# EAGLE board Transceiver_Board_V_1_5 (EAGLE 9.2.2)
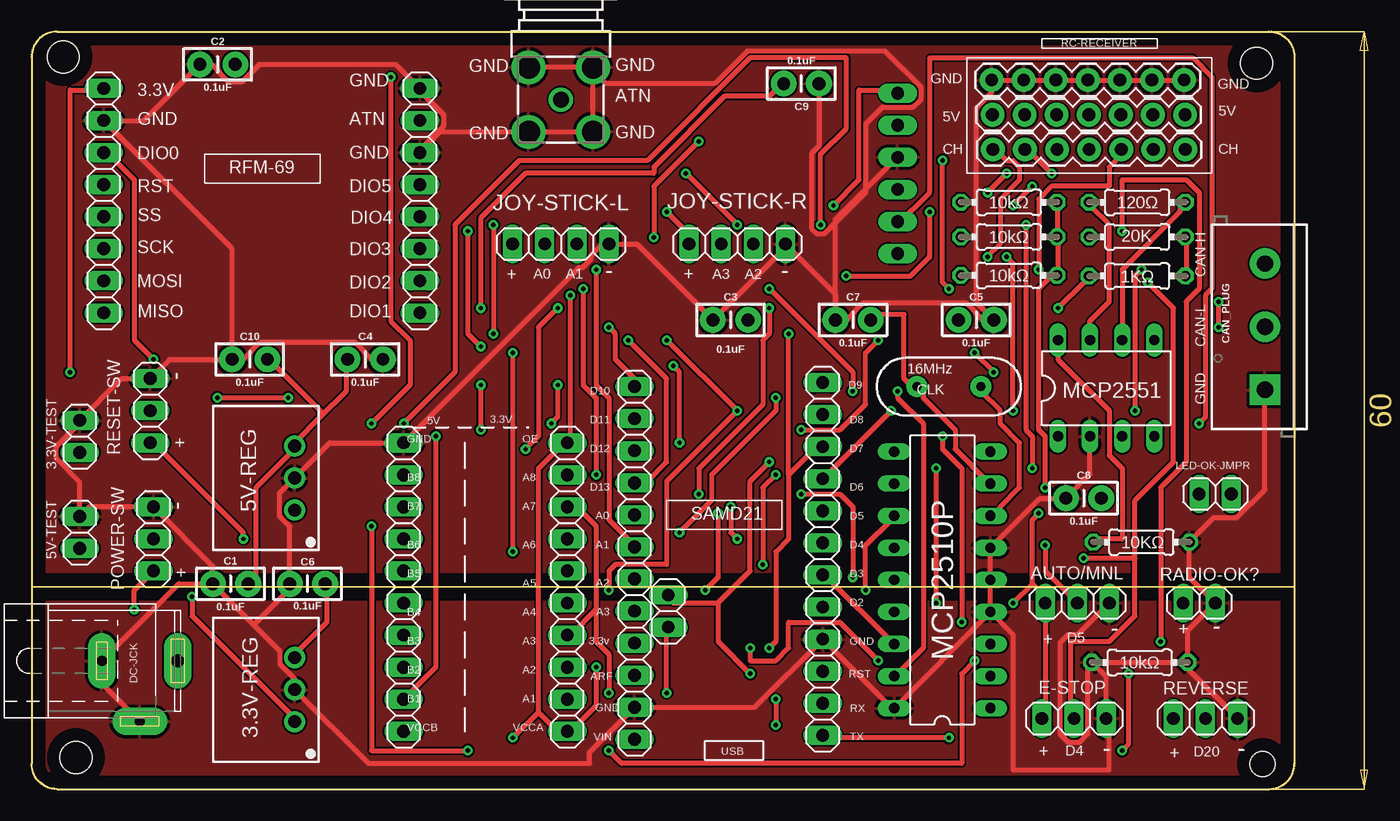
[diagram p0: board, top side]
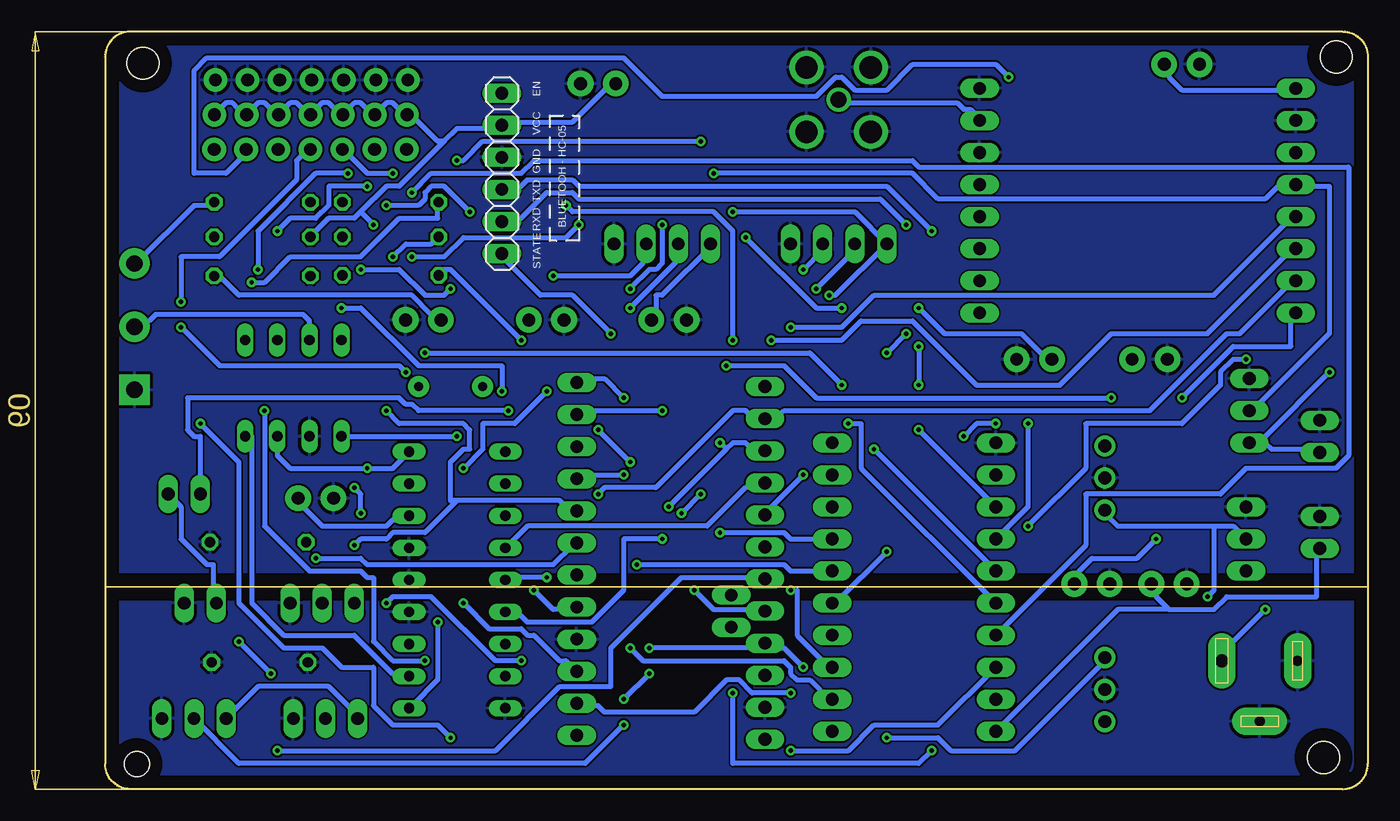
[diagram p1: board, bottom side, seen from below]

Size 100 x 60 mm. Coordinates in mm from the lower left corner, seen from the top.
Outline: 2,0 98,0 arc90 100,2 100,58 arc90 98,60 2,60 arc90 0,58 0,2 arc90 2,0
Copper layers (1*16): Top 0.035mm / dielectric 1.5mm / Bottom 0.035mm
Design rules "default *": minimum track width 15mil, minimum drill 0.35mm, track to track 6mil, track to pad 6mil, pad to pad 6mil, via to via 6mil, smd to smd 6mil, copper to edge 40mil, drill to drill 6mil, minimum pad ring 10mil, minimum via ring 8mil, stop-mask expansion 4mil, vias tented up to drill 0mil, thermal gap 10mil
Holes 2.54 mm at 2.51,58 97,57.49 3.52,2.51
Holes 2 mm at 97.49,2

## Footprints (pad centres in the part's own frame; a part is rotated, then mirrored left to right if it is on the bottom)
1X10 = drill 1.016 long: 1 -11.43,0; 2 -8.89,0; 3 -6.35,0; 4 -3.81,0; 5 -1.27,0; 6 1.27,0; 7 3.81,0; 8 6.35,0; 9 8.89,0; 10 11.43,0
SIP3 = drill 1 pad 1.676: 1 -2.54,0; 2 0,0; 3 2.54,0
1X02 = drill 1.016 long: 1 -1.27,0; 2 1.27,0
1X03 = drill 1.016 long: 1 -2.54,0; 2 0,0; 3 2.54,0
SPC4077 = drill 0.8 pad 2.184 long: 1 -3,0; 2 0,-4.8 | drill 1 pad 2.184 long: 3 3,0
1X06 = drill 1.016 long: 1 -6.35,0; 2 -3.81,0; 3 -1.27,0; 4 1.27,0; 5 3.81,0; 6 6.35,0
CAP-PTH-SMALL-KIT = drill 1.016 pad 2.032: 1 -1.397,0; 2 1.397,0
HC49US = drill 0.7 pad 1.651: 1 -2.54,0; 2 2.54,0
SCREWTERMINAL-5MM-3 = drill 1.3 pad 2.413 square: 1 0,0 | drill 1.3 pad 2.413: 2 5,0; 3 10,0
1X07 = drill 1.016 pad 1.88: 1 0,0; 2 2.54,0; 3 5.08,0; 4 7.62,0; 5 10.16,0; 6 12.7,0; 7 15.24,0
1X04 = drill 1.016 long: 1 -3.81,0; 2 -1.27,0; 3 1.27,0; 4 3.81,0
DIL18 = drill 0.813 long: 1 -10.16,-3.81; 2 -7.62,-3.81; 3 -5.08,-3.81; 4 -2.54,-3.81; 5 0,-3.81; 6 2.54,-3.81; 7 5.08,-3.81; 8 7.62,-3.81; 9 10.16,-3.81; 10 10.16,3.81; 11 7.62,3.81; 12 5.08,3.81; 13 2.54,3.81; 14 0,3.81; 15 -2.54,3.81; 16 -5.08,3.81; 17 -7.62,3.81; 18 -10.16,3.81
DIL08 = drill 0.813 long: 1 -3.81,-3.81; 2 -1.27,-3.81; 3 1.27,-3.81; 4 3.81,-3.81; 5 3.81,3.81; 6 1.27,3.81; 7 -1.27,3.81; 8 -3.81,3.81
0204/7 = drill 0.813 octagon: 1 -3.81,0; 2 3.81,0
1X08 = drill 1.016 long: 1 -8.89,0; 2 -6.35,0; 3 -3.81,0; 4 -1.27,0; 5 1.27,0; 6 3.81,0; 7 6.35,0; 8 8.89,0
BU-SMA-G = drill 1.27: 1 0,0 | drill 1.778: 2 -2.55,2.55; 3 2.55,2.55; 4 2.55,-2.55; 5 -2.55,-2.55
1X12 = drill 1.016 long: 1 -13.97,0; 2 -11.43,0; 3 -8.89,0; 4 -6.35,0; 5 -3.81,0; 6 -1.27,0; 7 1.27,0; 8 3.81,0; 9 6.35,0; 10 8.89,0; 11 11.43,0; 12 13.97,0

## Placement (x,y rotation side)
3.3-LOGIC  3.3V-LOGIC  [1X10]  42.42,16 90 top
3.3V-REG  3.3V REG  [SIP3]  20.83,7.87 90 top
3.3V-TEST  3.3V  [1X02]  3.81,27.94 90 top
5V-LOGIC  5V-LOGIC  [1X10]  29.46,16 90 top
5V-REG  5V REG  [SIP3]  20.83,24.64 90 top
5V-TEST  5V  [1X02]  3.81,20.32 90 top
AT/M  AUTO/MNL  [1X03]  82.8,14.73 0 top
BATTERY_INPUT_JACK  BATT-JACK  [SPC4077]  8.57,10.16 0 top
BLUETOOTH  BLUETOOTH  [1X06]  68.58,48.77 90 bottom
C1  0.1uF  [CAP-PTH-SMALL-KIT]  15.75,16.26 0 top
C2  0.1uF  [CAP-PTH-SMALL-KIT]  14.73,57.4 0 top
C3  0.1uF  [CAP-PTH-SMALL-KIT]  55.35,37.16 0 top
C4  0.1uF  [CAP-PTH-SMALL-KIT]  26.42,34.04 0 top
C5  0.1uF  [CAP-PTH-SMALL-KIT]  74.8,37.16 0 top
C6  0.1uF  [CAP-PTH-SMALL-KIT]  21.84,16.26 180 top
C7  0.1uF  [CAP-PTH-SMALL-KIT]  65.05,37.16 0 top
C8  0.1uF  [CAP-PTH-SMALL-KIT]  83.31,23.04 0 top
C9  0.1uF  [CAP-PTH-SMALL-KIT]  60.96,55.88 180 top
C10  0.1uF  [CAP-PTH-SMALL-KIT]  17.27,34.04 0 top
CAN_CLK  16MHz  [HC49US]  72.64,31.88 0 top
CAN_PLUG  CAN-PLUG  [SCREWTERMINAL-5MM-3]  97.66,31.62 90 top
COMM  COMM  [1X07]  76.13,50.66 0 top
E-STOP  E-STOP  [1X03]  82.55,5.59 0 top
I2C  I2C  [1X02]  50.42,14.1 90 top
JOY-STICK-L  LEFT-JOYSTICK  [1X04]  41.91,43.18 0 top
JOY-STICK-R  RIGHT-JOYSTICK  [1X04]  55.88,43.18 0 top
MCP2510P  MCP2510P  [DIL18]  72.12,16.57 90 top
MCP2551  MCP2551MCP2551  [DIL08]  85.09,31.75 0 top
POWER-SW  POWER-SW  [1X03]  9.65,19.81 90 top
R1  10kΩ  [0204/7]  77.39,46.48 0 top
R2  10kΩ  [0204/7]  77.39,43.74 0 top
R3  10kΩ  [0204/7]  77.39,40.69 0 top
R5  1KΩ  [0204/7]  87.55,40.64 0 top
R6  20K  [0204/7]  87.55,43.74 0 top
R7  10KΩ  [0204/7]  87.88,19.56 0 top
R8  120Ω  [0204/7]  87.55,46.48 0 top
R9  10kΩ  [0204/7]  87.76,10.03 0 top
RADIO-OK1  RADIO-OK-Jumper  [1X02]  93.73,23.37 0 top
RADIO-OK?  RADIO-OK?  [1X02]  92.46,14.73 0 top
RC-5V  RC-5V  [1X07]  76.1,53.41 0 top
RC-GND  RC-GND  [1X07]  76.02,56.17 0 top
RESET-SW  RESET-SW  [1X03]  9.4,29.97 90 top
REVERSE  REVERSE  [1X03]  92.96,5.59 0 top
RFM-69  RFM-69-R  [1X08]  30.75,46.61 90 top
RFM-ANTENNA  BU-SMA-G  [BU-SMA-G]  41.91,54.61 90 top
RFM_L  RFM-69-L  [1X08]  5.71,46.61 90 top
SAMD-21_R  SAMD-21-R  [1X12]  47.75,17.91 90 top
SAMD_21_L  SAMD-21-L  [1X12]  62.65,18.23 90 top

## Library data of the parts
3.3-LOGIC 3.3V-TEST 5V-LOGIC 5V-TEST AT/M BLUETOOTH E-STOP I2C JOY-STICK-L JOY-STICK-R POWER-SW RADIO-OK1 RADIO-OK? RESET-SW REVERSE RFM-69 RFM_L SAMD-21_R SAMD_21_L = pinhead
3.3V-REG 5V-REG = dc-dc-converter
BATTERY_INPUT_JACK = con-jack; OC_FARNELL: unknown; OC_NEWARK: unknown
C1-C10 = SparkFun-Capacitors; PROD_ID: CAP-08370
CAN_CLK = SparkFun-Clocks; PROD_ID: XTAL-08181; SF_ID: COM-00536
CAN_PLUG = SparkFun-Connectors; PROD_ID: CONN-10134; SF_SKU: PRT-08433
COMM RC-5V RC-GND = SparkFun-Connectors
MCP2510P = microchip_can
MCP2551 = MCP2551
R1-R3 R5-R9 = rcl; SPICEPREFIX: R
RFM-ANTENNA = con-coax; OC_FARNELL: unknown; OC_NEWARK: unknown

## Nets
3.3V-IN: 3.3-LOGIC.1 3.3-LOGIC.10 3.3V-REG.3 3.3V-TEST.1 AT/M.1 C2.2 C3.2 C6.1 E-STOP.1 JOY-STICK-L.1 JOY-STICK-R.1 R1.2 R2.2 R3.2 RESET-SW.1 REVERSE.1 RFM_L.8 SAMD-21_R.4
3.3V-IN1: C5.1 R5.2 R6.2
5V-IN: 5V-LOGIC.1 5V-REG.3 5V-TEST.1 BLUETOOTH.5 C1.2 C4.1 C9.2 C10.2 MCP2510P.9 MCP2551.3 R6.1 RC-5V.1 RC-5V.2 RC-5V.3 RC-5V.4 RC-5V.5 RC-5V.6 RC-5V.7
A0: JOY-STICK-L.2 SAMD-21_R.8
A1: JOY-STICK-L.3 SAMD-21_R.7
A2: JOY-STICK-R.3 SAMD-21_R.6
A3: JOY-STICK-R.2 SAMD-21_R.5
ATN: RFM-69.7 RFM-ANTENNA.1
BATT_V_IN: BATTERY_INPUT_JACK.3 POWER-SW.1
BT-RX: 5V-LOGIC.8 BLUETOOTH.3
CAN_RST: MCP2510P.17 R5.1
CANH: CAN_PLUG.2 MCP2551.7 R8.1
CANL: CAN_PLUG.3 MCP2551.6 R8.2
CH-1: 5V-LOGIC.2 COMM.1
CH-2: 5V-LOGIC.3 COMM.2
CH-3: 5V-LOGIC.4 COMM.3
CH-4: 5V-LOGIC.5 COMM.4
CH-5: 5V-LOGIC.6 COMM.5
CH-6: 5V-LOGIC.7 COMM.6
D2: MCP2510P.12 SAMD_21_L.5
D3: MCP2510P.16 SAMD_21_L.6
D4: E-STOP.2 R1.1 SAMD_21_L.7
D5: AT/M.2 R2.1 SAMD_21_L.8
D6: 3.3-LOGIC.6 RADIO-OK1.1 SAMD_21_L.9
D7: 3.3-LOGIC.2 BLUETOOTH.1 SAMD_21_L.10
D8: 3.3-LOGIC.3 BLUETOOTH.6 SAMD_21_L.11
D9: 3.3-LOGIC.7 SAMD_21_L.12
D10: RFM_L.4 SAMD-21_R.12
D11: MCP2510P.14 RFM_L.2 SAMD-21_R.11
D12: MCP2510P.15 RFM_L.1 SAMD-21_R.10
D13: MCP2510P.13 RFM_L.3 SAMD-21_R.9
D20: I2C.2 R3.1 REVERSE.2
D21: I2C.1 RFM_L.6
GND: 3.3V-REG.2 3.3V-TEST.2 5V-LOGIC.10 5V-REG.2 5V-TEST.2 AT/M.3 BATTERY_INPUT_JACK.1 BATTERY_INPUT_JACK.2 BLUETOOTH.4 C1.1 C2.1 C3.1 C4.2 C5.2 C6.2 C7.1 C8.1 C9.1 C10.1 CAN_PLUG.1 E-STOP.3 JOY-STICK-L.4 JOY-STICK-R.4 MCP2510P.4 MCP2510P.5 MCP2510P.6 MCP2510P.18 MCP2551.2 POWER-SW.3 R7.2 R9.1 R9.2 RADIO-OK?.2 RC-GND.1 RC-GND.2 RC-GND.3 RC-GND.4 RC-GND.5 RC-GND.6 RC-GND.7 RESET-SW.3 REVERSE.3 RFM-69.6 RFM-69.8 RFM-ANTENNA.2 RFM-ANTENNA.3 RFM-ANTENNA.4 RFM-ANTENNA.5 RFM_L.7 SAMD-21_R.2 SAMD_21_L.4
GRND: MCP2551.8 R7.1
INPUT_TO_REGULATOR_3.3V: 3.3V-REG.1 5V-REG.1 POWER-SW.2
N$1: RADIO-OK1.2 RADIO-OK?.1
OSC1: C7.2 CAN_CLK.1 MCP2510P.8
OSC2: C8.2 CAN_CLK.2 MCP2510P.7
RST: RESET-SW.2 RFM_L.5 SAMD_21_L.3
RX: 3.3-LOGIC.4 3.3-LOGIC.8 SAMD_21_L.2
RX-CAN: MCP2510P.2 MCP2551.4
TX: 3.3-LOGIC.5 BLUETOOTH.2 SAMD_21_L.1
TX-CAN: MCP2510P.1 MCP2551.1

## Tracks (layer width: path | path; a pad name or v marks a point on that pad's centre or on a via)
3.3V-IN  (via drill 0.35)
  Top 0.381: 3.3V-REG.3 20.83,10.67 23.37,13.21 23.37,16.26 C6.1 | v16.76,19.81 16.76,20.32 9.65,27.43 RESET-SW.1 | v3.05,33.02 3.05,55.37 5.59,55.37 RFM_L.8 | R1.2 81.28,46.23 81.28,44.2 R2.2 81.28,43.69 81.28,41.15 R3.2 80.77,40.64 79.76,39.62 79.76,28.45 80.26,27.94 v80.26,23.88 | E-STOP.1 80.26,5.59 AT/M.1 80.26,15.24 79.25,16.26 | v79.76,21.84 79.25,21.34 79.25,16.26 | v50.29,45.72 51.82,44.2 51.82,43.18 JOY-STICK-R.1 | v44.7,9.65 44.7,6.6 42.67,4.57 3.3-LOGIC.1 41.66,4.57 40.13,6.1 | 40.13,6.1 40.13,25.4 42.16,27.43 3.3-LOGIC.10 42.67,27.43 v42.67,39.12 | v77.72,14.73 79.25,16.26 | v67.06,10.16 64.01,13.21 59.94,13.21 59.94,11.18 58.93,10.16 56.9,10.16 v56.9,11.18 | 40.13,6.1 v38.1,4.06
  Bottom 0.381: RFM_L.8 6.1,55.37 14.73,55.37 15.75,56.39 15.75,57.4 C2.2 | 9.14,27.43 8.13,27.43 7.62,26.92 4.06,26.92 3.3V-TEST.1 | v16.76,19.81 18.29,18.29 21.84,18.29 22.86,17.27 22.86,16.26 C6.1 | v3.05,33.02 8.13,27.94 8.64,27.94 9.14,27.43 | 9.14,27.43 RESET-SW.1 | REVERSE.1 87.88,8.13 82.3,8.13 79.76,5.59 E-STOP.1 | v80.26,23.88 79.76,23.37 v79.76,21.84 | v50.29,45.72 40.64,45.72 JOY-STICK-L.1 42.16,39.12 v42.67,39.12 | C3.2 56.39,37.59 56.39,39.12 55.88,39.12 51.82,43.18 JOY-STICK-R.1 | v44.7,9.65 46.23,11.18 47.75,11.18 | v77.72,14.73 77.22,15.24 74.17,15.24 69.09,10.16 v67.06,10.16 | 47.75,11.18 v56.9,11.18 | 47.75,11.18 SAMD-21_R.4 | v38.1,4.06 34.04,4.06 33.02,3.05 27.94,3.05 20.83,10.16 3.3V-REG.3
3.3V-IN1
  Top 0.381: R5.2 91.44,40.64 91.44,43.69 R6.2
  Bottom 0.381: R5.2 90.93,40.64 89.41,39.12 75.69,39.12 74.17,37.59 73.66,37.59 C5.1
5V-IN  (via drill 0.35)
  Top 0.381: 22.86,29.46 24.89,31.5 24.89,34.04 C4.1 | 22.86,29.46 20.83,27.43 5V-REG.3 20.83,26.92 17.78,23.88 17.78,16.76 17.27,16.26 C1.2 | 22.86,29.46 22.86,29.97 18.8,34.04 C10.2 | v79.25,25.4 79.25,27.94 78.74,28.45 v78.74,44.7 | v35.56,38.1 35.56,45.21 39.12,48.77 49.28,48.77 49.28,49.28 54.86,54.86 58.42,54.86 59.44,55.88 C9.2
  Bottom 0.381: 15.75,14.22 12.19,14.22 11.18,15.24 4.06,15.24 4.06,18.8 5V-TEST.1 | 15.75,14.22 16.76,15.24 16.76,16.26 C1.2 | 5V-LOGIC.1 19.81,14.22 15.75,14.22 | MCP2551.3 86.36,26.42 85.34,25.4 v79.25,25.4 77.22,25.4 76.2,26.42 MCP2510P.9 | 79.76,45.72 77.72,47.75 76.71,47.75 73.15,51.31 | 79.76,45.72 80.26,45.21 82.3,45.21 83.31,44.2 R6.1 | 73.15,51.31 72.14,52.32 68.58,52.32 BLUETOOTH.5 68.58,52.83 62.99,52.83 59.94,55.88 C9.2 | 73.15,51.31 73.66,51.31 75.69,53.34 RC-5V.1 76.2,53.85 76.71,53.85 77.22,54.36 77.72,54.36 78.23,53.85 RC-5V.2 78.74,53.85 79.25,53.85 79.76,54.36 80.26,54.36 80.77,53.85 RC-5V.3 81.28,53.85 81.79,53.85 82.3,54.36 82.8,54.36 83.31,53.85 RC-5V.4 83.82,53.85 84.33,53.85 84.84,54.36 85.34,54.36 85.85,53.85 RC-5V.5 86.36,53.85 86.87,53.85 87.38,54.36 87.88,54.36 88.39,53.85 RC-5V.6 88.9,53.85 89.41,53.85 89.92,54.36 90.42,54.36 90.93,53.85 RC-5V.7 | 79.76,45.72 v78.74,44.7 | v35.56,38.1 33.53,36.07 27.43,36.07 25.4,34.04 C4.1
A0  (via drill 0.35)
  Top 0.381: v44.7,24.89 44.7,30.99 43.69,32 v43.69,39.62
  Bottom 0.381: v44.7,24.89 47.75,21.84 SAMD-21_R.8 | v43.69,39.62 40.64,42.67 JOY-STICK-L.2
A1  (via drill 0.35)
  Top 0.381: v44.7,41.15 44.7,32 45.72,30.99 45.72,21.34 47.75,19.3 SAMD-21_R.7
  Bottom 0.381: v44.7,41.15 43.18,42.67 JOY-STICK-L.3
A2  (via drill 0.35)
  Top 0.381: v86.36,3.05 86.87,3.56 v86.87,9.14 | v89.41,11.68 89.41,23.88 91.44,25.91 91.44,38.61 92.46,39.62 92.46,47.24 91.44,48.26 86.36,48.26 v86.36,44.2 | v77.72,46.23 v79.25,47.75 | v71.12,45.72 71.12,42.16 69.6,40.64 v64.52,40.64
  Bottom 0.381: v86.36,3.05 69.09,3.05 64.01,8.13 59.94,8.13 59.94,11.18 54.36,16.76 47.75,16.76 SAMD-21_R.6 | v89.41,11.68 v86.87,9.14 | v86.36,44.2 85.34,45.21 83.31,45.21 82.3,46.23 82.3,47.75 v79.25,47.75 | v77.72,46.23 75.18,46.23 74.68,46.74 74.68,47.24 74.17,47.75 73.15,47.75 v71.12,45.72 | v64.52,40.64 58.42,40.64 57.4,41.66 57.4,43.18 JOY-STICK-R.3
A3  (via drill 0.35)
  Top 0.381: v53.34,15.75 54.36,16.76 v54.36,21.84 | v52.83,23.37 52.83,25.4 57.91,30.48 57.91,35.56 58.42,36.07 v58.42,38.1
  Bottom 0.381: v53.34,15.75 51.82,14.22 47.75,14.22 SAMD-21_R.5 | v52.83,23.37 v54.36,21.84 | v58.42,38.1 54.86,41.66 54.86,43.18 JOY-STICK-R.2
ATN
  Bottom 0.381: RFM-69.7 30.99,53.34 31.5,53.85 32,53.85 32.51,54.36 41.66,54.36 RFM-ANTENNA.1
BATT_V_IN  (via drill 0.35)
  Top 0.381: POWER-SW.1 8.13,15.75 v8.13,14.22
  Bottom 0.381: v8.13,14.22 11.18,11.18 11.18,10.16 BATTERY_INPUT_JACK.3
BT-RX  (via drill 0.35)
  Top 0.381: v35.56,32 v35.56,28.45 | v35.56,35.05 34.54,36.07 v34.54,44.2
  Bottom 0.381: v35.56,28.45 5V-LOGIC.8 | v35.56,35.05 v35.56,32 | v34.54,44.2 38.1,47.75 62.48,47.75 62.99,48.26 66.55,48.26 67.06,47.75 68.58,47.75 BLUETOOTH.3
CAN_RST  (via drill 0.35)
  Top 0.381: v68.58,31.5 68.58,30.99 70.61,28.96 70.61,11.18 68.58,9.14 MCP2510P.17 | v81.28,38.1 83.31,40.13 83.31,40.64 R5.1
  Bottom 0.381: v68.58,31.5 68.58,33.53 75.18,33.53 79.76,38.1 v81.28,38.1
CANH
  Top 0.381: MCP2551.7 83.82,37.08 85.34,38.61 85.34,44.7 83.82,46.23 R8.1
  Bottom 0.381: MCP2551.7 83.82,37.08 84.33,37.59 96.01,37.59 96.52,37.08 97.54,37.08 CAN_PLUG.2
CANL
  Top 0.381: MCP2551.6 86.36,41.15 90.93,45.72 90.93,46.23 R8.2
  Bottom 0.381: CAN_PLUG.3 97.54,41.66 92.96,46.23 91.44,46.23 R8.2
CH-1  (via drill 0.35)
  Top 0.381: 5V-LOGIC.2 32,9.65 v32,27.94 | v29.46,28.96 33.53,33.02 33.53,44.7 38.61,49.78 48.77,49.78 56.9,57.91 64.52,57.91 64.52,52.32 62.48,50.29 v62.48,44.7 | v75.69,42.16 76.71,43.18 76.71,46.74 78.23,48.26 78.23,49.28 77.72,49.78 77.22,49.78 76.2,50.8 COMM.1
  Bottom 0.381: v32,27.94 30.99,28.96 v29.46,28.96 | v62.48,44.7 63.5,43.69 71.63,43.69 73.15,42.16 v75.69,42.16
CH-2  (via drill 0.35)
  Top 0.381: v45.72,3.05 46.74,2.03 73.66,2.03 73.66,9.14 v74.68,10.16 | v87.38,29.97 87.38,40.64 v87.88,41.15 | v80.77,48.77 78.74,50.8 COMM.2
  Bottom 0.381: 5V-LOGIC.3 34.04,5.08 39.12,5.08 41.15,3.05 v45.72,3.05 | v74.68,10.16 77.22,10.16 78.74,11.68 78.74,16.76 79.25,16.76 79.76,17.27 83.82,17.27 87.38,20.83 v87.38,29.97 | v87.88,41.15 87.88,44.2 83.31,48.77 v80.77,48.77
CH-3  (via drill 0.35)
  Top 0.381: v77.22,48.77 v75.69,47.24
  Bottom 0.381: 5V-LOGIC.4 22.35,19.3 22.35,23.37 11.68,23.37 9.65,25.4 2.54,25.4 1.52,26.42 1.52,49.28 35.56,49.28 36.07,49.78 66.04,49.78 67.06,48.77 74.17,48.77 v75.69,47.24 | v77.22,48.77 79.25,48.77 80.77,50.29 COMM.3
CH-4  (via drill 0.35)
  Top 0.381: v41.15,28.96 41.66,29.46 v41.66,32 | v76.2,33.02 v74.68,34.54 | v93.98,38.61 v93.98,36.58
  Bottom 0.381: 5V-LOGIC.5 40.13,25.4 40.13,28.96 v41.15,28.96 | v41.66,32 44.2,34.54 v74.68,34.54 | v76.2,33.02 76.71,33.53 90.93,33.53 v93.98,36.58 | v93.98,38.61 93.98,42.16 90.93,42.16 84.84,48.26 84.84,49.78 84.33,50.29 83.82,50.29 COMM.4
CH-5  (via drill 0.35)
  Top 0.381: v39.12,26.92 40.13,27.94 40.13,36.58 v41.66,38.1 | v49.28,43.69 49.28,47.75 v52.83,51.31 | v72.14,49.78 72.14,40.13 v72.64,39.62 | v79.76,41.15 79.76,46.74 80.77,47.75 85.34,47.75 85.34,49.28 85.85,49.78 85.85,50.29 COMM.5
  Bottom 0.381: v39.12,26.92 5V-LOGIC.6 | v41.66,38.1 43.69,38.1 v49.28,43.69 | v52.83,51.31 70.1,51.31 71.63,49.78 v72.14,49.78 | v72.64,39.62 73.15,39.12 74.68,39.12 76.71,41.15 v79.76,41.15
CH-6  (via drill 0.35)
  Top 0.381: v26.92,28.96 29.97,32 29.97,35.56 28.45,37.08 v28.45,56.39
  Bottom 0.381: 5V-LOGIC.7 26.92,22.35 v26.92,28.96 | v28.45,56.39 29.46,57.4 36.07,57.4 38.1,55.37 40.64,55.37 41.66,56.39 42.16,56.39 43.69,54.86 55.88,54.86 58.93,57.91 91.95,57.91 92.96,56.9 92.96,48.77 90.42,48.77 88.9,50.29 COMM.6
D2  (via drill 0.35)
  Top 0.381: v66.04,15.75 66.04,19.3 68.07,21.34 MCP2510P.12
  Bottom 0.381: v66.04,15.75 64.52,14.22 62.99,14.22 SAMD_21_L.5
D3
  Top 0.381: MCP2510P.16 68.07,11.68 62.99,16.76 SAMD_21_L.6
D4  (via drill 0.35)
  Top 0.381: v88.39,40.13 90.42,38.1 90.42,25.91 87.38,22.86 87.38,18.29 | 87.38,18.29 87.38,13.72 85.34,11.68 82.3,11.68 82.3,5.59 E-STOP.2 | 87.38,18.29 v83.31,18.29
  Bottom 0.381: v88.39,40.13 87.38,40.13 85.34,42.16 79.76,42.16 76.71,45.21 73.66,45.21 73.66,46.23 R1.1 | v83.31,18.29 79.76,18.29 79.25,17.78 64.52,17.78 62.99,19.3 SAMD_21_L.7
D5  (via drill 0.35)
  Top 0.381: v77.22,42.16 77.72,41.66 v77.72,29.97 | AT/M.2 80.26,17.27 v80.26,19.3
  Bottom 0.381: v77.22,42.16 76.2,43.18 74.17,43.18 73.66,43.69 R2.1 | v77.72,29.97 76.71,28.96 71.63,28.96 71.12,28.45 71.12,26.92 71.63,26.92 72.64,25.91 72.64,22.86 72.14,22.86 | 72.14,22.86 64.01,22.86 63.5,22.35 62.99,22.35 SAMD_21_L.8 | v80.26,19.3 79.76,19.81 77.72,19.81 77.22,20.32 74.68,20.32 72.14,22.86
D6  (via drill 0.35)
  Top 0.381: v57.91,17.78 57.91,23.88 v58.93,24.89 | v68.07,29.97 62.99,24.89 SAMD_21_L.9
  Bottom 0.381: 3.3-LOGIC.6 45.72,17.27 46.23,17.78 v57.91,17.78 | v58.93,24.89 62.48,24.89 SAMD_21_L.9 | RADIO-OK1.1 92.46,27.94 92.96,27.94 93.47,28.45 93.47,30.99 76.71,30.99 76.2,30.48 75.69,30.48 75.18,29.97 v68.07,29.97
D7  (via drill 0.35)
  Top 0.381: v58.42,11.18 58.93,11.68 58.93,18.8 59.94,19.81 59.94,24.89 | 59.94,24.89 62.48,27.43 SAMD_21_L.10 | 59.94,24.89 v59.94,36.07
  Bottom 0.381: v58.42,11.18 57.4,10.16 46.23,10.16 45.72,9.65 45.72,9.14 45.21,8.64 44.2,8.64 42.67,7.11 3.3-LOGIC.2 | v59.94,36.07 62.99,39.12 65.53,39.12 68.58,42.16 BLUETOOTH.1
D8  (via drill 0.35)
  Top 0.381: v45.72,15.75 45.72,17.27 46.23,17.78 50.29,17.78 50.29,24.38 v55.88,29.97 v50.29,35.56 | v63.5,46.23 65.53,48.26 65.53,55.37 68.58,55.37 BLUETOOTH.6
  Bottom 0.381: v45.72,15.75 45.21,15.75 45.21,12.19 42.67,9.65 3.3-LOGIC.3 | v55.88,29.97 62.48,29.97 SAMD_21_L.11 | v63.5,46.23 62.99,45.72 51.82,45.72 50.29,44.2 v50.29,35.56
D9  (via drill 0.35)
  Top 0.381: v51.31,20.32 53.85,22.86 53.85,24.89 58.93,29.97 v58.93,30.99
  Bottom 0.381: 3.3-LOGIC.7 45.72,19.81 46.23,20.32 v51.31,20.32 | v58.93,30.99 60.45,32.51 62.48,32.51 SAMD_21_L.12
D10  (via drill 0.35)
  Top 0.381: v45.72,36.58 46.23,36.07 46.23,34.04 47.75,32.51 SAMD-21_R.12
  Bottom 0.381: v45.72,36.58 41.66,36.58 39.12,39.12 12.19,39.12 6.1,45.21 RFM_L.4
D11  (via drill 0.35)
  Top 0.381: v65.02,16.76 65.02,22.35 64.01,23.37 v60.96,23.37
  Bottom 0.381: v65.02,16.76 68.07,16.76 MCP2510P.14 | v60.96,23.37 60.45,23.88 56.39,23.88 50.29,29.97 49.28,29.97 48.77,29.46 47.75,29.46 | 47.75,29.46 46.74,29.46 46.23,29.97 17.27,29.97 11.18,36.07 10.16,36.07 6.1,40.13 RFM_L.2 | 47.75,29.46 SAMD-21_R.11
D12  (via drill 0.35)
  Top 0.381: v55.88,19.81 55.37,20.32 v55.37,22.35 | v20.32,30.99 v14.73,30.99 | v50.8,33.53 51.31,33.02 v51.31,27.43
  Bottom 0.381: v55.88,19.81 58.93,19.81 58.93,15.75 61.47,13.21 66.55,13.21 67.06,13.72 68.07,13.72 MCP2510P.15 | 50.8,26.92 50.29,27.43 49.28,27.43 48.77,26.92 47.75,26.92 SAMD-21_R.10 | 50.8,26.92 v55.37,22.35 | v14.73,30.99 10.67,35.05 6.1,35.05 6.1,37.59 RFM_L.1 | v20.32,30.99 43.69,30.99 46.23,33.53 v50.8,33.53 | 50.8,26.92 v51.31,27.43
D13  (via drill 0.35)
  Top 0.381: v47.24,35.56 50.29,32.51 50.29,25.91 48.77,24.38 47.75,24.38 SAMD-21_R.9
  Bottom 0.381: MCP2510P.13 68.07,19.3 66.55,20.83 52.32,20.83 49.28,23.88 47.75,23.88 SAMD-21_R.9 | v47.24,35.56 41.66,35.56 40.13,37.08 36.07,37.08 30.99,32 24.38,32 20.32,36.07 12.7,36.07 6.1,42.67 RFM_L.3
D20  (via drill 0.35)
  Top 0.381: v67.06,35.56 66.04,34.54 66.04,30.48 64.01,28.45 v60.96,28.45 | v58.42,25.91 56.9,24.38 56.9,17.27 54.36,14.73 | 54.36,14.73 50.8,14.73 50.8,15.24 I2C.2 | v58.93,7.11 v58.93,5.08 | v56.9,9.14 54.36,11.68 54.36,14.73
  Bottom 0.381: v67.06,35.56 72.64,41.15 73.15,41.15 R3.1 | v58.42,25.91 v60.96,28.45 | REVERSE.2 89.41,2.03 61.98,2.03 v58.93,5.08 | v56.9,9.14 v58.93,7.11
D21  (via drill 0.35)
  Top 0.381: v50.29,7.62 50.29,12.7 I2C.1 | v34.54,3.05 26.92,3.05 v26.92,20.83 | v9.65,34.04 8.13,35.56 8.13,48.26 6.1,50.29 RFM_L.6
  Bottom 0.381: v50.29,7.62 50.29,2.03 35.56,2.03 v34.54,3.05 | v26.92,20.83 22.35,25.4 22.35,28.96 14.73,28.96 11.68,32 11.68,33.02 10.67,34.04 v9.65,34.04
GND
  Top 0.381: BATTERY_INPUT_JACK.2 5.57,8.36 BATTERY_INPUT_JACK.1 11.67,16.26 C1.1 | C1.1 17.59,13.02 | 17.59,13.02 19.65,10.96 19.65,9.93 20.83,8.74 3.3V-REG.2 26.67,2.03 44.2,2.03 44.2,2.92 SAMD-21_R.2 57.25,6.48 SAMD_21_L.4 68.12,6.41 MCP2510P.18 MCP2510P.4 | 17.59,13.02 20.45,15.88 C6.2 20.45,20.81 19.65,21.61 19.65,23.46 5V-REG.2 23.62,27.43 5V-LOGIC.10 43.34,41.31 43.64,41.31 44.28,41.96 44.28,42.25 45.21,43.18 JOY-STICK-L.4 47.93,43.18 C3.1 59.69,42.9 JOY-STICK-R.4 63.65,39.22 C7.1 | C1.1 14.35,17.65 POWER-SW.3 4.57,22.35 5V-TEST.2 3.81,24.34 1.94,26.21 1.94,27.13 3.81,29 3.3V-TEST.2 7.11,32.51 RESET-SW.3 10.92,34.04 C10.1 | C10.1 16.75,34.04 18.11,35.4 25.58,35.4 26.94,34.04 C4.2 | C10.1 15.88,42.8 RFM_L.7 8.89,52.96 C2.1 14.21,57.4 15.57,56.05 16.69,56.05 18.05,57.4 28.84,57.4 RFM-69.8 30.75,55.28 32.62,53.42 32.62,52.5 30.75,50.63 RFM-69.6 32.39,52.06 RFM-ANTENNA.2 RFM-ANTENNA.5 44.46,56.9 | 44.46,56.9 RFM-ANTENNA.4 RFM-ANTENNA.3 | MCP2510P.4 MCP2510P.5 MCP2510P.6 79.86,23.04 C8.1 83.82,24.94 MCP2551.2 | MCP2510P.4 77.72,12.23 77.72,1.52 85.34,1.52 85.34,5.33 E-STOP.3 85.09,8.89 R9.1 | R9.1 R9.2 | R9.2 91.57,12.57 RADIO-OK?.2 91.69,16.76 R7.2 93.64,21.5 95.45,21.5 97.66,23.71 CAN_PLUG.1 | C7.1 64.53,37.16 65.88,38.52 73.97,38.52 75.33,37.16 C5.2 74.81,38.55 74.81,53.94 76.02,55.15 RC-GND.1 RC-GND.2 RC-GND.3 RC-GND.4 RC-GND.5 RC-GND.6 RC-GND.7 | C7.1 63.65,45.11 BLUETOOTH.4 | 44.46,56.9 45.48,55.88 54.11,55.88 56.67,58.45 67.58,58.45 70.45,55.58 70.45,54.66 69.8,54.01 67.36,54.01 66.06,52.72 66.06,47.27 62.78,43.98 62.19,43.98 61.76,44.41 61.76,50.33 62.36,50.92 C9.1
  Top 0.381: REVERSE.3 91.57,9.53 R9.2 | R9.1 83.66,9.74 83.66,4.37 83.01,3.72 82.09,3.72 81.44,4.37 81.44,11.59 82.08,12.22 82.83,12.22 AT/M.3
  pour Top: 2,0 arc-90 0,2 0,58 arc-90 2,60 98,60 arc-90 100,58 100,2 arc-90 98,0
  pour Bottom: 2,0 arc-90 0,2 0,58 arc-90 2,60 98,60 arc-90 100,58 100,2 arc-90 98,0
GRND
  Top 0.381: MCP2551.8 81.28,34.04 85.34,29.97 85.34,26.42 86.36,25.4 86.36,19.81 84.33,19.81 R7.1
INPUT_TO_REGULATOR_3.3V  (via drill 0.35)
  Top 0.381: v12.7,15.24 12.7,13.72 20.83,5.59 3.3V-REG.1
  Bottom 0.381: POWER-SW.2 10.67,20.83 12.19,20.83 | 12.19,20.83 19.81,20.83 20.83,21.84 5V-REG.1 | v12.7,15.24 12.19,15.75 12.19,20.83
N$1
  Bottom 0.381: RADIO-OK1.2 93.98,22.35 93.98,19.81 91.95,17.78 91.44,17.78 91.44,14.73 RADIO-OK?.1
OSC1
  Top 0.381: MCP2510P.8 75.69,24.38 73.15,26.92 73.15,28.45 70.61,30.99 70.61,31.5 70.1,32 CAN_CLK.1 70.1,31.5 69.09,32.51 69.09,37.59 66.55,37.59 C7.2
OSC2
  Top 0.381: CAN_CLK.2 75.18,31.5 76.71,29.97 76.71,28.96 78.23,27.43 78.23,23.88 76.71,22.35 76.71,21.84 76.2,21.34 MCP2510P.7
  Bottom 0.381: MCP2510P.7 76.2,21.34 77.22,21.34 77.72,20.83 82.8,20.83 84.84,22.86 C8.2
RST  (via drill 0.35)
  Top 0.381: v71.63,25.4 v71.63,14.73 | v65.02,31.5 65.02,33.02 v58.42,39.62 | v51.82,48.77 v55.88,44.7
  Bottom 0.381: RESET-SW.2 9.14,29.97 3.05,36.07 3.05,47.75 5.59,47.75 RFM_L.5 6.1,47.75 7.11,47.75 8.13,46.74 34.04,46.74 36.07,48.77 v51.82,48.77 | v71.63,14.73 69.6,12.7 67.06,12.7 66.55,12.19 66.04,12.19 64.01,10.16 63.5,10.16 62.99,9.65 SAMD_21_L.3 | v71.63,25.4 70.1,26.92 70.1,28.96 67.56,28.96 v65.02,31.5 | v58.42,39.62 56.9,41.15 56.39,41.15 55.88,41.66 v55.88,44.7
RX  (via drill 0.35)
  Top 0.381: 44.7,14.22 42.67,12.19 3.3-LOGIC.4 | 44.7,14.22 44.7,20.83 43.18,22.35 3.3-LOGIC.8 | v45.72,7.62 45.72,10.67 44.7,11.68 44.7,14.22
  Bottom 0.381: v45.72,7.62 48.77,7.62 49.78,8.64 50.8,8.64 53.34,6.1 60.45,6.1 60.96,6.6 62.48,6.6 SAMD_21_L.2
RX-CAN
  Bottom 0.381: MCP2551.4 88.39,27.94 88.39,14.73 85.85,12.19 80.26,12.19 77.22,9.14 76.2,9.14 MCP2510P.2
TX  (via drill 0.35)
  Top 0.381: v72.64,4.06 62.99,4.06 SAMD_21_L.1 | v92.46,28.96 92.96,29.46 92.96,39.12 93.47,39.62 93.47,56.39 91.95,57.91 71.12,57.91 71.12,47.24 68.58,44.7 BLUETOOTH.2 | v38.1,34.54 v38.1,18.8 | v36.58,44.7 v36.58,36.07
  Bottom 0.381: v72.64,4.06 73.66,5.08 77.22,5.08 78.74,6.6 78.74,9.65 81.28,9.65 82.8,11.18 85.85,11.18 89.41,14.73 89.41,25.91 v92.46,28.96 | v38.1,18.8 42.16,14.73 3.3-LOGIC.5 | v36.58,36.07 v38.1,34.54 | v36.58,44.7 38.61,46.74 62.48,46.74 62.99,47.24 65.02,47.24 67.06,45.21 68.58,45.21 BLUETOOTH.2
TX-CAN  (via drill 0.35)
  Top 0.381: v73.66,13.21 73.66,25.4 72.14,26.92 v72.14,27.94
  Bottom 0.381: v73.66,13.21 73.66,8.64 75.69,6.6 MCP2510P.1 | MCP2551.1 v72.14,27.94

## Text on the board
tPlace: RC-RECEIVER | GND | GND | GND | GND | 3.3V | GND | ATN | GND | ATN | 5V | 5V | GND | GND | DIO0 | GND | CH | CH | RFM-69 | RST | DIO5 | SS | DIO4 | SCK | DIO3 | CAN-H | MOSI | DIO2 | + | A0 | A1 | - | + | A3 | A2 | - | MISO | DIO1 | CAN-L | 16MHz | - | D9 | D10 | CLK | GND | 5V | 3.3V | D11 | D8 | + | GND | OE | D12 | D7 | LED-OK-JMPR | B8 | A8 | D13 | D6 | - | B7 | A7 | A0 | SAMD21 | D5 | B6 | A6 | A1 | D4 | + | B5 | D3 | A5 | A2 | B4 | A4 | A3 | D2 | D5 | - | + | - | B3 | A3 | 3.3v | GND | + | B2 | A2 | ARF | RST | DC-JCK | B1 | A1 | GND | RX | VCCB | VCCA | VIN | TX | USB | + | D4 | - | D20 | - | +
bPlace: EN | VCC | GND | TXD | BLUETOOH - HC-05 | RXD | STATE